# Altium PCB Challenge_2_actual.PcbDoc
Units mil, origin at the board's own origin, x right, y up, seen from the top; angles counter-clockwise.
Board outline 3000 x 2000 mil, 2 copper layers (Top Layer, Bottom Layer); 44 components, 39 nets, 215 pads, 4 vias.
Unrouted connection lines stored in the file: 106.
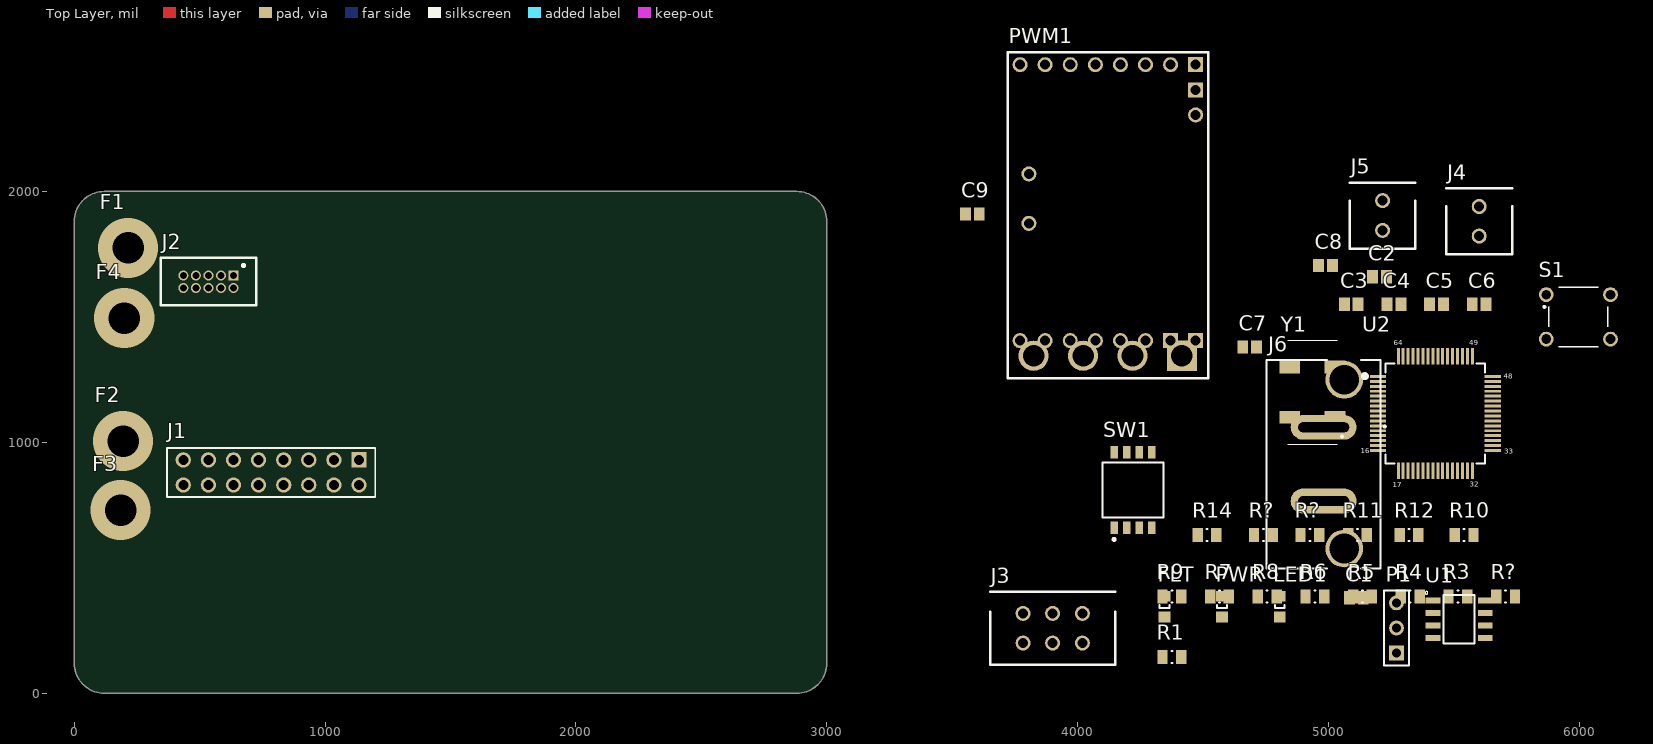
[diagram p0: Top Layer view]
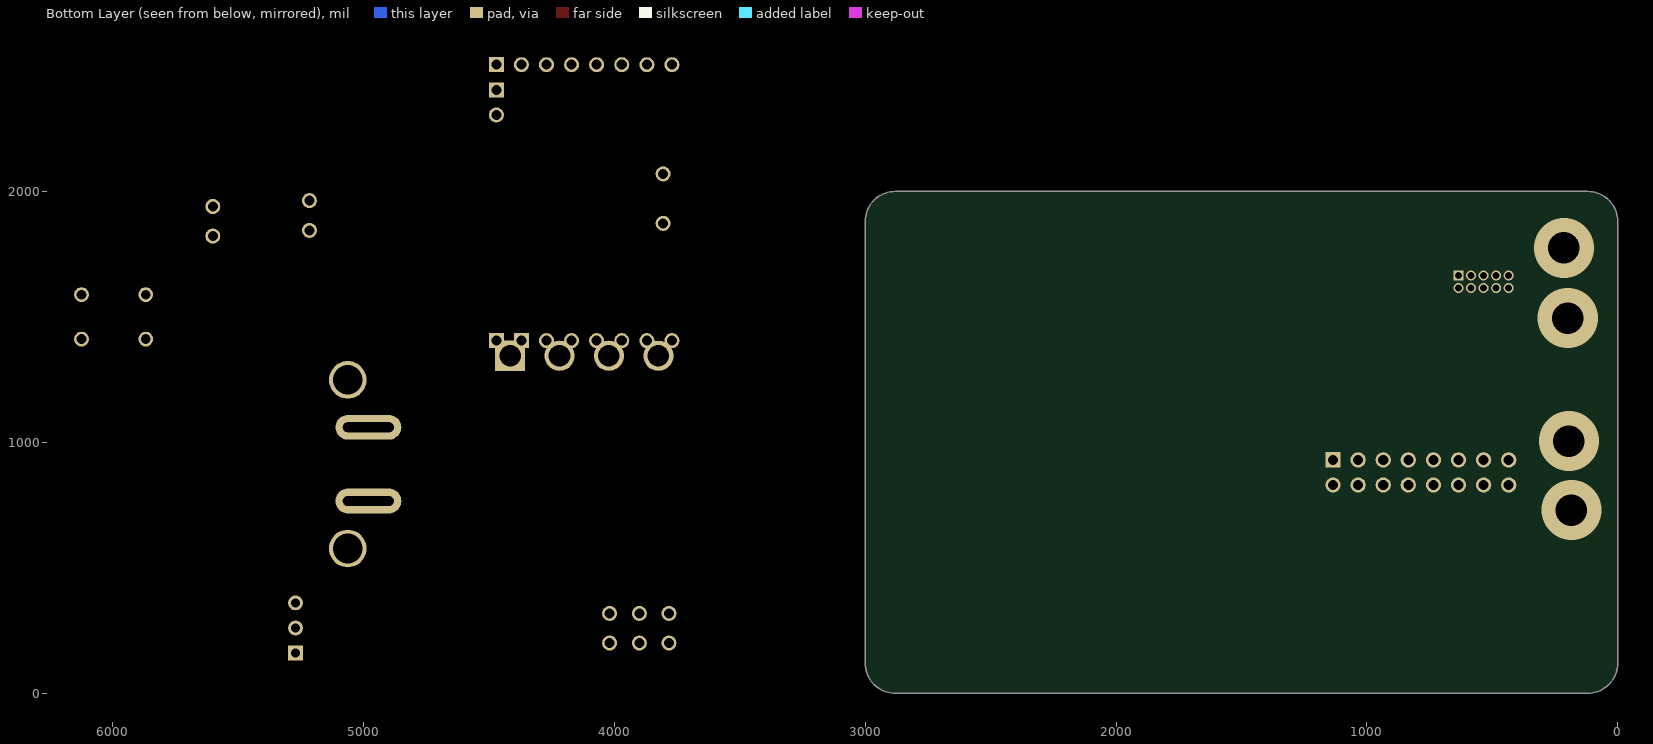
[diagram p1: Bottom Layer view, seen from below]

## Layer stack, top to bottom
Top Solder: solder mask 0.4, Solder Resist, Dk 3.5
Top Layer: signal copper 1.4
Dielectric 1: dielectric 12.6, FR-4, Dk 4.8
Bottom Layer: signal copper 1.4
Bottom Solder: solder mask 0.4, Solder Resist, Dk 3.5

## Board outline
120,0 2880,0 ccw(c2880,120) 3000,120 3000,1880 ccw(c2880,1880) 2880,2000 120,2000 ccw(c120,1880) 0,1880 0,120 ccw(c120,120)

## Design rules (kind name [scope] priority, off if disabled: settings)
Clearance [All] p1: gap=10 ignorepadtopadclearanceinfootprint=FALSE except(0: Arc-Hole Track-Hole SMDPad-Hole THPad-Hole Via-Hole Fill-Hole Poly-Hole Region-Hole Text-Hole)
PolygonConnect [All] p1: connectstyle=Relief reliefconductorwidth=10 reliefentries=4 polygonreliefangle="90 Angle" airgapwidth=10
RoutingVias [All] p1: holewidth=28 width=50 viastyle="Through Hole" minholewidth=28 minwidth=50 maxholewidth=28 maxwidth=50
SolderMaskExpansion [All] p1: expansion=4
Width [All] p1: maxlimit=10 minlimit=10 preferedwidth=10
30 further rules are at their usual default settings.

## Classes and differential pairs
component class Motor_Interface: C2 C9 J4 J5 J6 PWM1 R10 R11 R12 R14 R?
component class MC_Sheet: C3 C4 C5 C6 C7 C8 F1 F2 F3 F4 J1 J2 R2 R3 R4 R5 R6 R7 R8 R9 R? S1 SW1 U2 Y1
component class CAN: C1 FLT LED1 P1 PWR R1 U1

## Components (designator, comment, footprint, x,y, rotation, side; value= is the part's Value field where it differs from the comment)
C1 "0.1 uF" CAPC2013X140X50LL20T25 5110,380 r0 top
C2 "0.1 uF" CAPC2013X140X50LL20T25 5202.56,1660 r0 top
C3 "10 uF" CAPC2013X140X50LL20T25 5090,1550 r0 top
C4 "0.1 uF" CAPC2013X140X50LL20T25 5260,1550 r0 top
C5 "10 uF" CAPC2013X140X50LL20T25 5430,1550 r0 top
C6 "0.1 uF" CAPC2013X140X50LL20T25 5600,1550 r0 top
C7 "0.1 uF" CAPC2013X140X50LL20T25 4685,1380 r0 top
C8 "0.1 uF" CAPC2013X140X50LL20T25 4987.56,1705 r0 top
C9 "Big ass motherfucker" CAPC2013X140X50LL20T25 3580,1910 r0 top
F1 "Screw Hole" "Screw Hole" 215,1775 r0 top
F2 "Screw Hole" "Screw Hole" 195,1005 r0 top
F3 "Screw Hole" "Screw Hole" 185,730 r0 top
F4 "Screw Hole" "Screw Hole" 200,1495 r0 top
FLT "150080SS75000" 0805_A 4345,345 r90 top
J1 "SSQ-108-02-G-D" SMTC-SSQ-108-02-X-D 1135,830 r180 top
J2 "Programming Header" programming 730.28,1756.77 r180 top
J3 "Molex Micro" "microfit 6 pin" 3959.06,259.06 r180 top
J4 "Molex micro-" "Microfit 2 pin" 5600,1821.89 r0 top
J5 "Molex micro-" "Microfit 2 pin" 5215,1845 r0 top
J6 "Super Saber" "Super Sabre" 5179.71,506.45 r90 top
LED1 "150080SS75000" 0805_A 4805,345 r90 top
P1 "Header 3" HDR1X3 5270,160 r90 top
PWM1 "6.5V - 40V" Pololu_G2_Driver_24v21 3720,2555 r270 top
PWR "150080SS75000" 0805_A 4575,345 r90 top
R1 "120R" RESC0805(2012)_N 4375,145 r0 top value="120.00 Ohm"
R3 "100R" RESC0805(2012)_N 5515,385 r0 top value="120.00 Ohm"
R4 "100R" RESC0805(2012)_N 5325,385 r0 top value="120.00 Ohm"
R5 "100R" RESC0805(2012)_N 5135,385 r0 top value="120.00 Ohm"
R6 "100R" RESC0805(2012)_N 4945,385 r0 top value="120.00 Ohm"
R7 "10k" RESC0805(2012)_N 4565,385 r0 top value="120.00 Ohm"
R8 "100R" RESC0805(2012)_N 4755,385 r0 top value="120.00 Ohm"
R9 "10k" RESC0805(2012)_N 4375,385 r0 top value="120.00 Ohm"
R10 "100R" RESC0805(2012)_N 5540,630 r0 top value="120.00 Ohm"
R11 "100R" RESC0805(2012)_N 5115,630 r0 top value="120.00 Ohm"
R12 "100R" RESC0805(2012)_N 5320,630 r0 top value="120.00 Ohm"
R14 "4k7" RESC0805(2012)_N 4515,630 r0 top value="120.00 Ohm"
R? "100R" RESC0805(2012)_N 5705,385 r0 top value="120.00 Ohm"
R? "4k7" RESC0805(2012)_N 4740,630 r0 top value="120.00 Ohm"
R? "47k" RESC0805(2012)_N 4925,630 r0 top value="120.00 Ohm"
S1 "1825910-7" "Switch 6mm 24V (NO)" 5995,1500 r0 top
SW1 "TDA04H0SB1" CKCP-TDA04H0SB1R_V 4220,810 r90 top
U1 "MCP2562-E/SN" SOIC127P600X175-8N 5520,295 r0 top
U2 "CY8C4248AZI-L485" TQFP50P1200X1200X160-64N 5425,1115 r0 top
Y1 "SG-636PCW_50.0000MC3__ROHS" SG-636 4935,1200 r90 top

## Footprints (in the part's own frame and the unit in brackets; to place one, negate y for a bottom-side part, rotate by r counter-clockwise, add the part's x,y. Pads: shape width x height; smd on the part's side, far side on the other; paste and mask are expansions set on the pad)
0805_A [mm] "Chip LED, 2-Leads, Body 2.0x1.3mm, IPC Medium Density"
  rect 1.1x1.2 smd: 1(-1.05,0) 2(1.05,0)
  silkscreen extent -0.15,-0.5 0.15,0.5, body extent -1,-0.62 1,0.63, height 0.68
CAPC2013X140X50LL20T25 [mm] "Chip Capacitor, 2-Leads, Body 2.00x1.25mm, IPC High Density"
  rect 1.1x1.35 smd: 1(-0.7,0) 2(0.7,0)
  body extent -1.1,-0.72 1.1,0.72, height 1.4
CKCP-TDA04H0SB1R_V [mm] "SMD, 8-Leads, Body 6.21x6.2mm, Pitch 1.27mm"
  rect 1.27x0.76 smd: 1(-3.81,1.905) 2(-3.81,0.635) 3(-3.81,-0.635) 4(-3.81,-1.905) 5(3.81,-1.905) 6(3.81,-0.635) 7(3.81,0.635) 8(3.81,1.905)
  silkscreen extent -5.12,-3.11 2.78,3.11, body extent -4.06,-3.1 4.06,3.11, height 2.3
HDR1X3 [mm] "Connector; Header; 3 Position"
  rect 1.5x1.5 hole 0.9: 1(0,0)
  round 1.5 hole 0.9: 2(2.54,0) 3(5.08,0)
  silkscreen extent -1.27,-1.27 6.35,1.27
"Microfit 2 pin" [mil] "Molex Micro fit 3.0"
  round 60 hole 40: 1(0,0) 2(0,118.11)
  round 0 hole 40 unplated: ""(-118.11,155.12) ""(118.11,155.12)
  silkscreen extent -131,-73 131,190
"microfit 6 pin" [mil] "Molex micro-fit 3.0 6 position"
  round 60 hole 40: 1(-59.06,59.06) 2(-59.06,-59.06) 3(59.06,59.06) 4(59.06,-59.06) 5(177.17,59.06) 6(177.17,-59.06)
  round 0 hole 40 unplated: 7(295.28,-96.06) ""(-177.17,-96.06)
  silkscreen extent -190,-145 308,145
Pololu_G2_Driver_24v21 [mil] "Pololu G2 High-Power Motor Driver 24v21"
  rect 120x120 hole 86: 1(1210,695)
  rect 60x60 hole 40: 1a(1150,750) 1b(1150,650) 14(50,750) 15(150,750)
  round 120 hole 86: 2(1210,498) 3(1210,301) 4(1210,104)
  round 60 hole 40: 2a(1150,550) 2b(1150,450) 3a(1150,350) 3b(1150,250) 4a(1150,150) 4b(1150,50) 5(682,85) 6(485,85) 7(50,50) 8(50,150) 9(50,250) 10(50,350) 11(50,450) 12(50,550) 13(50,650) 16(250,750)
  silkscreen extent 0,0 1300,800
programming [mil]
  rect 40x40 hole 28 mask+3: 1(95.28,91.77)
  round 40 hole 28 mask+3: 2(95.28,141.77) 3(145.28,91.77) 4(145.28,141.77) 5(195.28,91.77) 6(195.28,141.77) 7(245.28,91.77) 8(245.28,141.77) 9(295.28,91.77) 10(295.28,141.77)
  silkscreen extent 5,22 385,211
RESC0805(2012)_N [mm] "Chip Resistor, Body 2.0x1.3mm, IPC Medium Density"
  rect 1.05x1.4 smd: 1(-0.95,0) 2(0.95,0)
  silkscreen extent -0.05,-0.6 0.05,0.6, body extent -1.1,-0.67 1.1,0.68, height 0.7
"Screw Hole" [mil]
SG-636 [mm]
  rect 1.3x2.1 smd: 1(-2.54,-2.3) 2(2.54,-2.3) 3(2.54,2.3) 4(-2.54,2.3)
  silkscreen extent -5.25,-3.1 5.25,2.5
SMTC-SSQ-108-02-X-D [mm] "SQ Post Socket, 2x8 Pins, Vertical, 2.54mm Pitch, Female"
  rect 1.55x1.55 hole 1.02: 1(0,-2.54)
  round 1.55 hole 1.02: 2(0,0) 3(2.54,-2.54) 4(2.54,0) 5(5.08,-2.54) 6(5.08,0) 7(7.62,-2.54) 8(7.62,0) 9(10.16,-2.54) 10(10.16,0) 11(12.7,-2.54) 12(12.7,0) 13(15.24,-2.54) 14(15.24,0) 15(17.78,-2.54) 16(17.78,0)
  silkscreen extent -1.65,-3.74 19.43,1.2, body extent -1.52,-3.75 19.3,1.21, height 8.51
SOIC127P600X175-8N [mm]
  rect 1.5x0.6 smd: 1(-2.65,1.905) 2(-2.65,0.635) 3(-2.65,-0.635) 4(-2.65,-1.905) 5(2.65,-1.905) 6(2.65,-0.635) 7(2.65,0.635) 8(2.65,1.905)
  silkscreen extent -3.44,-2.45 1.58,2.81
"Super Sabre" [mil]
  oval 99x263 hole 203 slot 39 at 0 deg: 1(553.55,199.71) 2(259.55,199.71)
  round 150 hole 118: ""(70.55,117.71) ""(742.55,117.71)
  silkscreen extent -9,-48 822,427
"Switch 6mm 24V (NO)" [mm]
  round 1.498 hole 0.99: 1(-3.25,2.25) 2(3.25,2.25) 3(-3.25,-2.25) 4(3.25,-2.25)
  silkscreen extent -3.53,-3 3,3
TQFP50P1200X1200X160-64N [mm]
  rect 1.65x0.3 smd mask+0: 1(-5.801,3.75) 2(-5.801,3.25) 3(-5.801,2.75) 4(-5.801,2.25) 5(-5.801,1.75) 6(-5.801,1.25) 7(-5.801,0.75) 8(-5.801,0.25) 9(-5.801,-0.25) 10(-5.801,-0.75) 11(-5.801,-1.25) 12(-5.801,-1.75) 13(-5.801,-2.25) 14(-5.801,-2.75) 15(-5.801,-3.25) 16(-5.801,-3.75) 33(5.801,-3.75) 34(5.801,-3.25) 35(5.801,-2.75) 36(5.801,-2.25) 37(5.801,-1.75) 38(5.801,-1.25) 39(5.801,-0.75) 40(5.801,-0.25) 41(5.801,0.25) 42(5.801,0.75) 43(5.801,1.25) 44(5.801,1.75) 45(5.801,2.25) 46(5.801,2.75) 47(5.801,3.25) 48(5.801,3.75)
  rect 0.3x1.65 smd mask+0: 17(-3.75,-5.801) 18(-3.25,-5.801) 19(-2.75,-5.801) 20(-2.25,-5.801) 21(-1.75,-5.801) 22(-1.25,-5.801) 23(-0.75,-5.801) 24(-0.25,-5.801) 25(0.25,-5.801) 26(0.75,-5.801) 27(1.25,-5.801) 28(1.75,-5.801) 29(2.25,-5.801) 30(2.75,-5.801) 31(3.25,-5.801) 32(3.75,-5.801) 49(3.75,5.801) 50(3.25,5.801) 51(2.75,5.801) 52(2.25,5.801) 53(1.75,5.801) 54(1.25,5.801) 55(0.75,5.801) 56(0.25,5.801) 57(-0.25,5.801) 58(-0.75,5.801) 59(-1.25,5.801) 60(-1.75,5.801) 61(-2.25,5.801) 62(-2.75,5.801) 63(-3.25,5.801) 64(-3.75,5.801)
  silkscreen extent -7.33,-5.05 5.05,5.05, body extent -5.12,-5.12 5.12,5.12, height 1.6

## Part data
C1 C2 C3 C4 C5 C6 C7 C8 C9: library part CMP-2000-05810-1, "Chip Capacitor, 2.2 uF, +/- 10%, 10 V, -55 to 85 degC, 0805 (2012 Metric), RoHS, Tape and Reel", Capacitance=2.2µF, Case Size/Dimension=0805, Dielectric=X5R, Manufacturer=AVX, Package Description="2-Pin Surface Mount Device, Body 2.01 x 1.25 mm", Rated Voltage=10V, Tolerance (%)=±10%, Datasheet URL=http://datasheets.avx.com/cx5r.pdf, Datasheet Version=05/2016, Manufacturer URL=http://www.avx.com/, Mounting Technology=SurfaceMount, Package Reference=0805
F1 F2 F3 F4: "Add 4 of these to your design for screw hole mounting"
FLT LED1 PWR: library part CMP-1426-00010-1, "SMD mono-color Chip LED, WL-SMCW, Super Red", Color="Super Red", Manufacturer="Wuerth Elektronik", ComponentLink1Description="Manufacturer URL", ComponentLink1URL=http://www.we-online.com, ComponentLink2Description=Datasheet, ComponentLink2URL=http://katalog.we-online.com/led/datasheet/150080SS75000.pdf, PackageReference=0805_A, PartNumber=150080SS75000
J1: library part CMP-1023-00300-1, "SQ Post Socket, Through-hole, Vertical, -55 to 125 degC, 2.54 mm Pitch, 16-Pin, Female, RoHS", Manufacturer=Samtec, Temperature Range="-55 to 125 degC", ComponentLink1Description="Manufacturer URL", ComponentLink1URL=http://www.samtec.com, ComponentLink2Description=Datasheet, ComponentLink2URL=http://www.samtec.com/documents/webfiles/pdf/SSQ_TH.PDF, ComponentLink3Description="Package Specification", ComponentLink3URL=http://www.samtec.com/documents/webfiles/cpdf/SSQ-1XX-XX-XXX-X-XX-XXX-XX-X-MKT.pdf, DatasheetVersion=F-214, Mounting Technology=Through-hole, Orientation=Vertical, PackageDescription="Assembly, Socket Strip .025[0.64] SQ Tail", PackageReference=SSQ-108-02-X-D, PackageVersion="BD, 6/1987", PartNumber=SSQ-108-02-G-D, Pitch="2.54 mm", RoHS=True
J3: library part "Molex micro-fit 6-pin (dual row schematic)", "Molex micro-fit 3.0 dual row connector. P/N 0430450627"
J4 J5: library part "Molex micro-fit 2-pin", "Molex micro-fit 3.0. Molex P/N 0430450227"
P1: "Header, 3-Pin", LatestRevisionDate=17-Jul-2002, LatestRevisionNote="Re-released for DXP Platform.", Publisher="Altium Limited"
PWM1: library part "Pololu G2 High-Power Motor Driver 24v21", "This discrete MOSFET H-bridge motor driver enables bidirectional control of one high-power DC brushed motor. The small 1.3? × 0.8? board supports a wide 6.5 V to 40 V voltage range and is efficient enough to deliver a continuous 21 A without a heat sink. Additional features of this second-generation (G2) driver include reverse-voltage protection along with basic current sensing and current limiting functionality.", ComponentLink1Description="Product Info", ComponentLink1URL=https://www.pololu.com/product/2995/specs
R1 R3 R4 R5 R6 R7 R8 R9 R10 R11 R12 R14 R? R? R?: library part "Resistor 0805", "Generic 0805 Resistor", Case-EIA=0805, Case-Metric=2012, Power="0.125 W", Tolerance="5 %", Technology=SMT
S1: library part "Switch 6mm 24V (NO)", "FSM4JAH=6MM TACT SWITCH, HIGH TEMP", Contact_Current_Rating="50 mA", Package=None, Configuration_Pole-Throw="Single Pole - Single Throw", Digi-Key_Part_Number=450-1804-ND, Digi-Key_Purchase_URL=https://www.digikey.com/product-detail/en/te-connectivity-alcoswitch-switches/1825910-7/450-1804-ND/1731414?utm_source=snapeda&utm_medium=aggregator&utm_campaign=symbol, EU_RoHS_Compliance=Compliant, MF="TE Connectivity", MP=1825910-7, SnapEDA_Link=https://www.snapeda.com/parts/1825910-7/TE%20Connectivity%20ALCOSWITCH%20Switches/view-part/?ref=snap, TE_purchase_URL=https://www.te.com/usa-en/product-1825910-7.html?te_bu=Cor&te_type=disp&te_campaign=seda_glo_cor-seda-global-disp-prtnr-fy19-seda-model-bom-cta_sma-317_1&elqCampaignId=32493
SW1: library part "Dip Switch Array SMD Half-Pitch", "Ultra-Miniature Surface Mount Half-Pitch DIP Switch, 25 mA, 24 V, -40 to 85 degC, 8-Pin SMD, RoHS, Tube", Case\Package=DIP, Contact Current Rating="100 mA", Max Contact Resistance="100 mohm", Max Current Rating="25 mA", Max Operating Temperature="85 degC", Max Voltage Rating (DC)="24 V", Min Operating Temperature="-40 degC", Package Quantity=70, ComponentLink1Description=Datasheet, ComponentLink1URL=http://www.ck-components.com/media/1328/tda.pdf, Contact Finish=Gold, Contact Material=Copper, Contact Plating=Gold, Current Rating="100 mA", DatasheetVersion=02/2016, Height="2.3 mm", Lead Pitch="1.27 mm", Length="6.21 mm", Mount="Surface Mount", Mounting Technology="Surface Mount", PackageDescription="8-Pin Surface Mount Device, Body 6.21 x 6.2 mm, Pitch 1.27 mm", PackageReference=TDA04H0SB1R, Packaging=Rail/Tube, Pins=4, Radiation Hardening=No, REACH SVHC="No SVHC", RoHSCompliant=true, Throw Configuration=SPST, Voltage Rating (DC)="24 V"
U1: library part "CAN Tranceiver", "Microchip MCP2562-E/SN, CAN Transceiver 1MBps 1-channel IEC 61000-4-2, 8-Pin SOIC", Package="SO-8 Microchip", Availability=Unavailable, MF=Microchip, MP=MCP2562-E/SN, Price=None, SnapEDA_Link=https://www.snapeda.com/parts/MCP2562-E/SN/Microchip/view-part/?ref=snap
U2: library part "PSOC MC", "64 pin psoc", Part_Number=CY8C4248AZI-L485
Y1: library part Oscilator, "Standard Clock Oscillators", Arrow Part Number="SG-636PCW 50.0000MC3: ROHS", Manufacturer_Name="Epson Timing", Datasheet Link=http://www.mouser.com/ds/2/137/G-636PCE_en-1003252.pdf, Manufacturer_Part_Number="SG-636PCW 50.0000MC3: ROHS"

## Via types
v1: diameter 240, hole 126, Top Layer to Bottom Layer, 4 vias

## Nets (pads, with @x,y where several pads share a name; then routed paths per layer and width w, separated by ;. In a path a pad name is that pad's centre, name@x,y a point inside that pad or via, vN(x,y) a via of type N, cw(c..) or ccw(c..) an arc to the next point about the centre after c; other vN are vias at no path point)
+5: C1.1 C2.2 C3.1 C4.1 C5.1 C6.1 C7.2 C8.1 FLT.2 J1.1 J2.10 J3.2 LED1.2 PWR.2 R7.2 R14.2 U1.3 U1.5 U2.11 U2.26 U2.50 U2.56 Y1.4
+24: J1.5 J1.7 J1.9 J1.11 J1.13 J1.15 PWM1.4 PWM1.4a PWM1.4b
CANH: J1.3 P1.2 R1.2 U1.7
CANL: J1.4 P1.1 R1.1 U1.6
CS: PWM1.9 U2.9
DIR: PWM1.13 U2.38
ENCA: R10.1 U2.53
ENCB: R11.1 U2.54
ENCZ: R12.2 U2.55
FLT: PWM1.10 R14.1 U2.32
GND: C1.2 C2.1 C3.2 C4.2 C5.2 C6.2 C8.2 J1.6 J1.8 J1.10 J1.12 J1.14 J1.16 J2.2 J2.4 J2.6 J2.8 J3.1 J4.1 J5.1 PWM1.1 PWM1.1a PWM1.1b PWM1.14 PWM1.15 R9.1 R?.1@4887.6,630 S1.1 S1.2 SW1.5 SW1.6 SW1.7 SW1.8 U1.2 U1.8 Y1.2
LIM1: J4.2 U2.8
LIM2: J5.2 U2.7
NetC9_1: C9.1 PWM1.6
NetC9_2: C9.2 PWM1.5
NetJ3_3: J3.3 R11.2
NetJ3_4: J3.4 R12.1
NetJ3_5: J3.5 R10.2
NetJ6_1: J6.1 PWM1.3 PWM1.3a PWM1.3b
NetJ6_2: J6.2 PWM1.2 PWM1.2a PWM1.2b
NetPWM1_16: PWM1.16 R?.2@4962.4,630
NetR3_1: R3.1 SW1.1
NetR3_2: R3.2 U2.15
NetR4_1: R4.1 SW1.2
NetR4_2: R4.2 U2.14
NetR5_1: R5.1 SW1.3
NetR5_2: R5.2 U2.13
NetR6_1: R6.1 SW1.4
NetR6_2: R6.2 U2.12
NetR8_2: R8.2 R?.1@5667.6,385 U2.47
NetR?_2: R?.2@5742.4,385 S1.3 S1.4
NetU2_45: U2.45 Y1.1 Y1.3
PWM: PWM1.12 U2.37
RXD: U1.4 U2.39
SLP: PWM1.11 U2.33
SWDCLK: J2.7 R9.2 U2.27
SWDIO: J2.9 R7.1 U2.28
TXD: U1.1 U2.40
XRES: J2.1 R8.1
pads on no net: C7.1 FLT.1 J1.2 J2.3 J2.5 J3. J3.6 J3.7 J4. J5. J6. LED1.1 P1.3 PWM1.7 PWM1.8 PWR.1 R?.1@4702.6,630 R?.2@4777.4,630 U2.1 U2.2 U2.3 U2.4 U2.5 U2.6 U2.10 U2.16 U2.17 U2.18 U2.19 U2.20 U2.21 U2.22 U2.23 U2.24 U2.25 U2.29 U2.30 U2.31 U2.34 U2.35 U2.36 U2.41 U2.42 U2.43 U2.44 U2.46 U2.48 U2.49 U2.51 U2.52 U2.57 U2.58 U2.59 U2.60 U2.61 U2.62 U2.63 U2.64
copper on no net:
  other v1: 185,730 195,1005 200,1495 215,1775

## Text inside footprints (layer, text, board x,y; h text height)
U2: Top Overlay "64" at 5260,1387 h19.68; Top Overlay "49" at 5561,1387 h19.68; Top Overlay "48" at 5698,1253 h19.68; Top Overlay "33" at 5699,955 h19.68; Top Overlay "32" at 5563,823 h19.68; Top Overlay "17" at 5256,821 h19.68; Top Overlay "16" at 5127.35,956.13 h19.68